# Altium PCB UHVValveCtrlv1.PcbDoc (part 1 of 2)
Units mm, origin at the board's own origin, x right, y up, seen from the top; angles counter-clockwise.
Board outline 139.7 x 45.72 mm, 2 copper layers (Top Layer, Bottom Layer); 66 components, 39 nets, 217 pads, 30 vias.
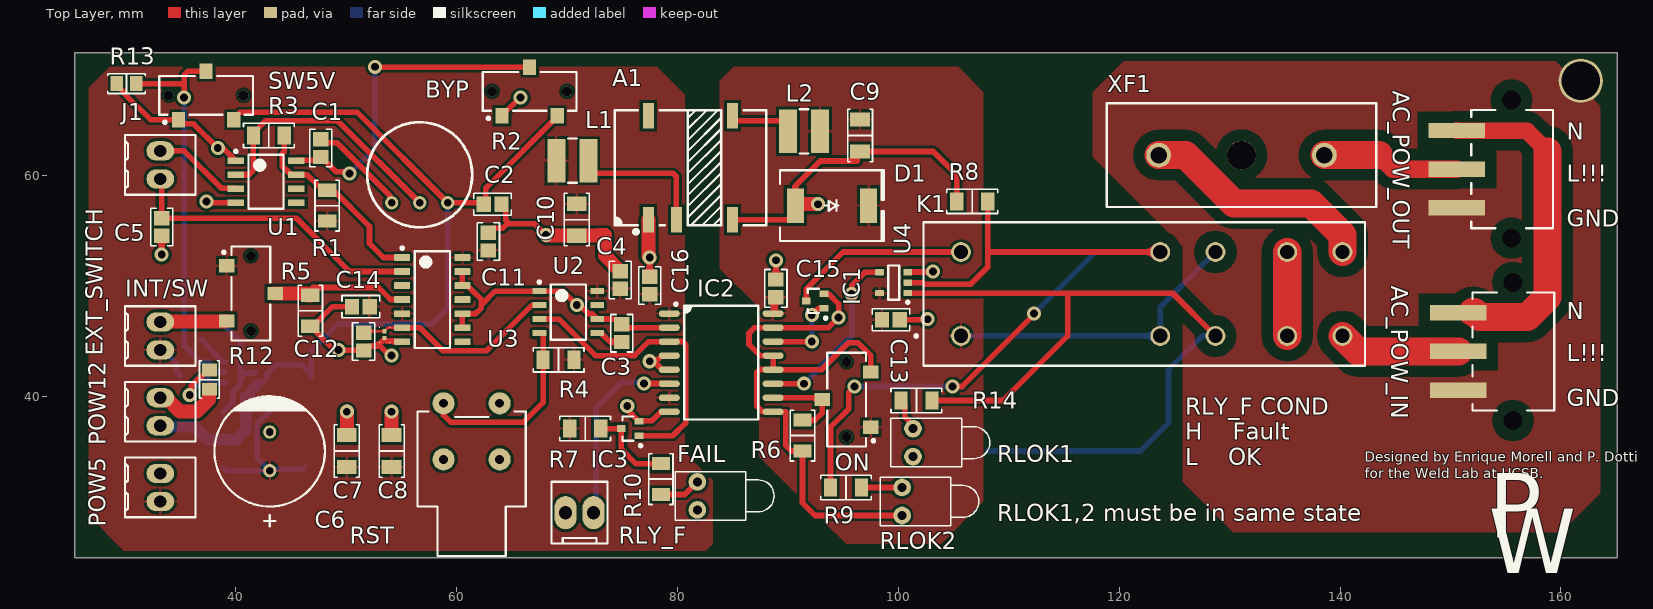
[diagram p0: Top Layer view]
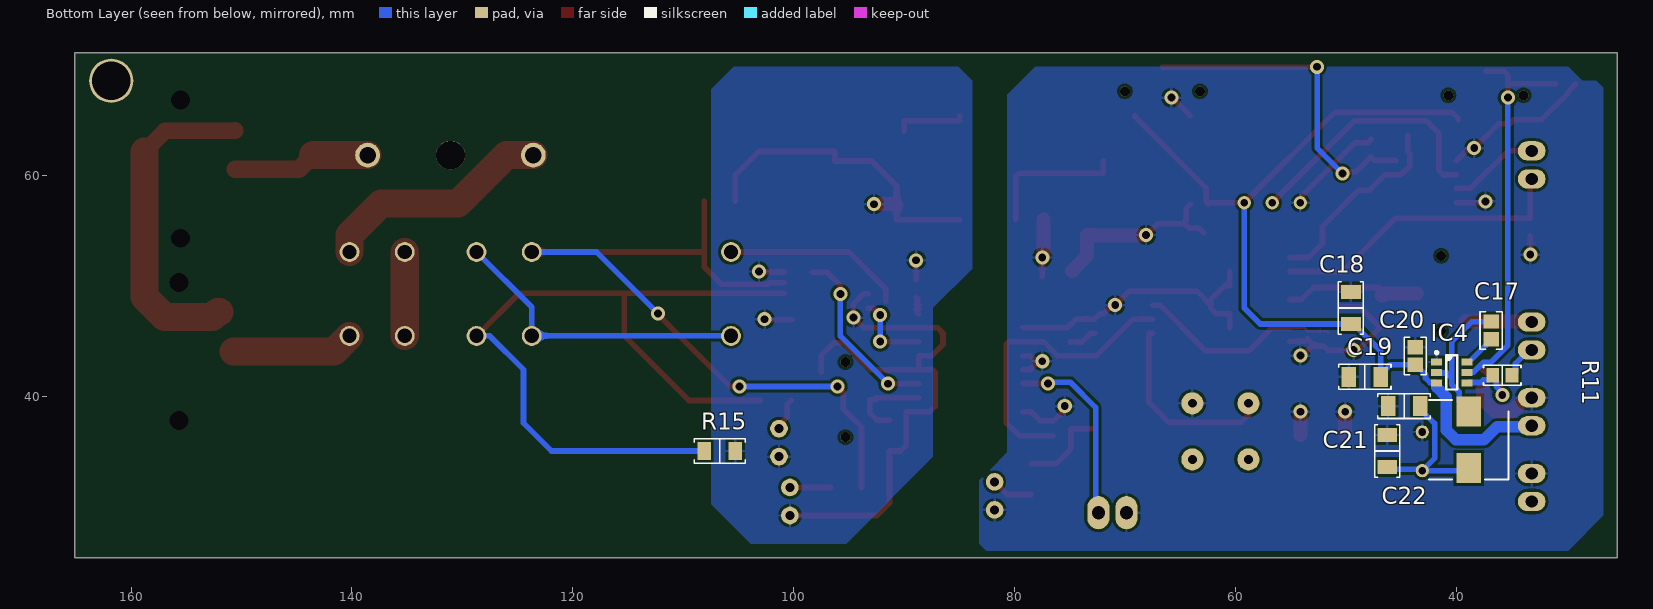
[diagram p1: Bottom Layer view, seen from below]
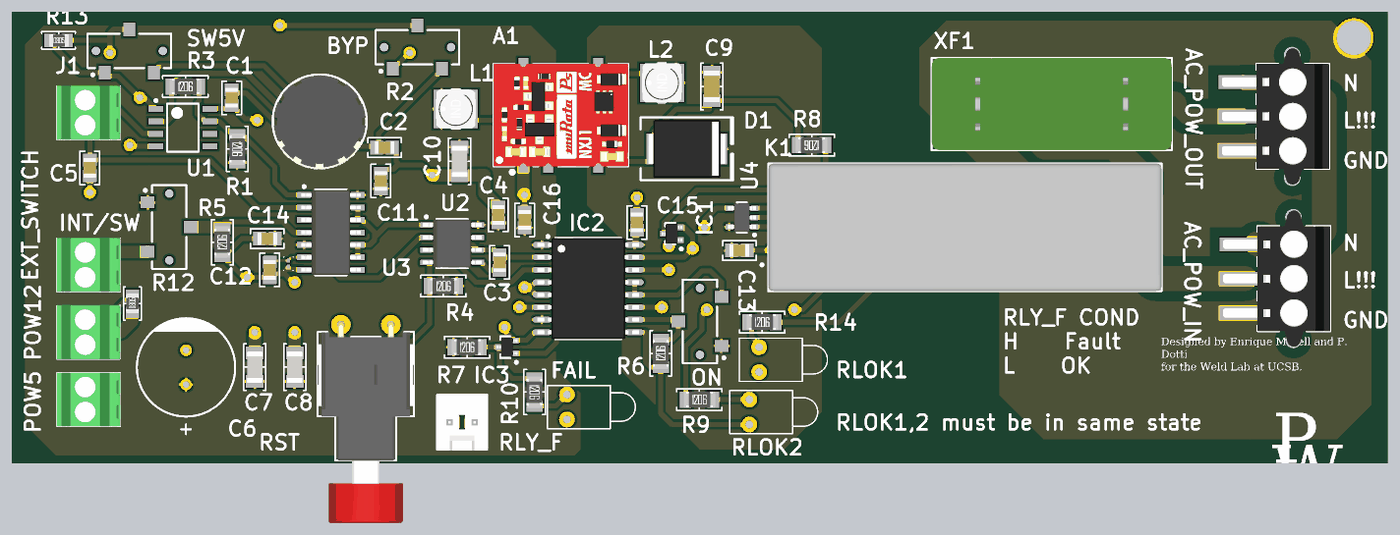
[diagram p2: 3D render of the assembled board from above, using the file's embedded part models]
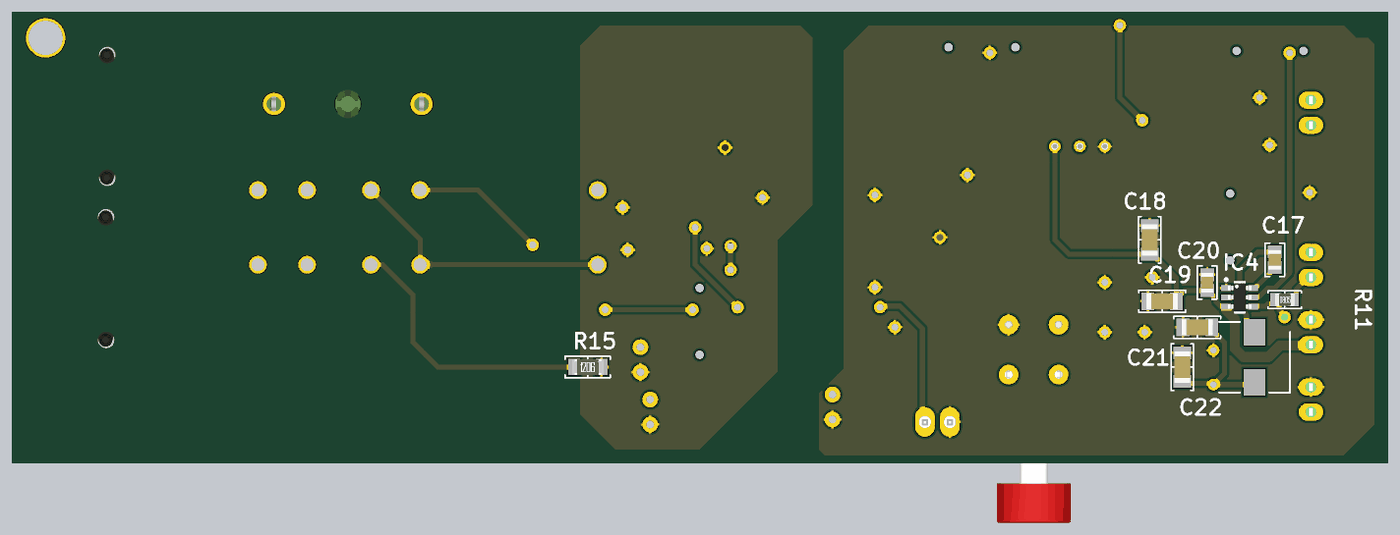
[diagram p3: 3D render of the assembled board from below, using the file's embedded part models]

## Layer stack, top to bottom
Top Solder: solder mask 0.0102, Solder Resist, Dk 3.5
Top Layer: signal copper 0.0356
Dielectric 1: dielectric 0.32, FR-4, Dk 4.8
Bottom Layer: signal copper 0.0356
Bottom Solder: solder mask 0.0102, Solder Resist, Dk 3.5

## Board outline
25.4,25.4 25.4,71.12 165.1,71.12 165.1,25.4

## Design rules (kind name [scope] priority, off if disabled: settings)
Clearance Clearance_1 [All vs InNetClass('AC')] p1: gap=1.016 ignorepadtopadclearanceinfootprint=FALSE
Clearance [All] p2: gap=0.152 ignorepadtopadclearanceinfootprint=FALSE
HoleSize [All] p1: absolutevalues=TRUE maxlimit=4 minlimit=0.254 maxpercent=80.000 minpercent=20.000
PlaneClearance PlaneClearance_1 [InNetClass('AC')] p1: clearance=1.27
PlaneClearance [All] p2: clearance=0.508
PolygonConnect PolygonConnect_1 [All vs InNetClass('AC')] p1: thpad.connectstyle=Direct thpad.reliefconductorwidth=0.254 thpad.reliefentries=4 thpad.polygonreliefangle="90 Angle" thpad.airgapwidth=0.254 smdpad.connectstyle=Direct smdpad.reliefconductorwidth=0.254 smdpad.reliefentries=4 smdpad.polygonreliefangle="90 Angle" smdpad.airgapwidth=0.254 via.connectstyle=Relief via.reliefconductorwidth=0.254 via.reliefentries=4 via.polygonreliefangle="90 Angle" via.airgapwidth=0.254
PolygonConnect [All] p2: connectstyle=Relief reliefconductorwidth=0.254 reliefentries=4 polygonreliefangle="90 Angle" airgapwidth=0.254
RoomDefinition U_Logic [InComponentClass('U_Logic')] p1: confinementstyle=ConfineIn formatcopy=TRUE lockcomponents=FALSE outline 49.276,42.926 64.262,42.926 64.262,56.134 49.276,56.134
RoomDefinition U_IonValveCtrl [InComponentClass('U_IonValveCtrl')] p2: confinementstyle=ConfineIn formatcopy=TRUE lockcomponents=FALSE outline 67.31,25.146 160.274,25.146 160.274,68.58 67.31,68.58
RoomDefinition U_InputConnectors [InComponentClass('U_InputConnectors')] p3: confinementstyle=ConfineIn formatcopy=TRUE lockcomponents=FALSE outline 28.056,67.097 28.056,69.555 32.69,69.555 32.69,70.515 41.898,70.515 41.898,53.924 44.607,53.924 44.607,50.71 50.984,50.71 50.984,37.756 55.556,37.756 55.556,32.348 48.407,32.348 48.407,27.862 37.699,27.862 37.699,28.096 29.093,28.096 29.093,67.097
RoomDefinition U_FlipFlop [InComponentClass('U_FlipFlop')] p4: confinementstyle=ConfineIn formatcopy=TRUE lockcomponents=FALSE outline 54.987,17.936 54.987,41.644 66.475,41.644 66.475,50.859 73.474,50.859 73.474,52.575 76.132,52.575 76.132,46.479 76.259,46.479 76.259,42.421 71.844,42.421 71.844,41.878 67.695,41.878 67.695,17.936
RoomDefinition U_AnalogPressure [InComponentClass('U_AnalogPressure')] p5: confinementstyle=ConfineIn formatcopy=TRUE lockcomponents=FALSE outline 38.847,56.607 38.847,62.695 40.351,62.695 40.351,65.056 51.041,65.056 51.041,65.672 61.989,65.672 61.989,70.876 71.197,70.876 71.197,63.666 65.275,63.666 65.275,56.075 62.243,56.075 62.243,54.47 51.041,54.47 51.041,54.648 46.831,54.648 46.831,56.607
RoutingVias [All] p1: holewidth=0.711 width=1.27 viastyle="Through Hole" minholewidth=0.711 minwidth=1.27 maxholewidth=0.711 maxwidth=1.27
SilkToSolderMaskClearance [IsPad] p1: minsilkscreentomaskgap=0.15 clearancetoexposedcopper=TRUE
SolderMaskExpansion [All] p1: expansion=0.102
Width Width_1 [InNetClass('AC')] p1: maxlimit=5.08 minlimit=1.02 preferedwidth=2.54
Width [All] p2: maxlimit=1.27 minlimit=0.254 preferedwidth=0.508
27 further rules are at their usual default settings.

## Classes and differential pairs
net class AC: AC_GND AC_LIVE AC_LIVE_Fuse AC_LIVE_IN AC_LIVE_OUT AC_NEUTRAL
component class U_Logic: C11 C12 C14 U3
component class U_IonValveCtrl: A1 AC_POW_IN AC_POW_OUT C9 C10 C13 C15 C16 D1 FAIL IC1 IC2 IC3 K1 L1 L2 ON R6 R7 R8 R9 R10 R14 R15 RLOK1 RLOK2 RLY_F U4 XF1
component class U_InputConnectors: C5 C6 C7 C8 C17 C18 C19 C20 C21 C22 EXT_SWITCH IC4 INT/SW J1 POW5 POW12 R5 R11 R12 R13 SW5V
component class U_FlipFlop: C3 C4 R4 RST U2
component class U_AnalogPressure: BYP C1 C2 R1 R2 R3 U1

## Components (designator, comment, footprint, x,y, rotation, side; value= is the part's Value field where it differs from the comment)
A1 "NXJ1S0505MC-R7" "MURATA NXJ1" 82.423,60.706 r0 top
AC_POW_IN "691508110303" "WURTH 691508110303" 155.702,44.069 r270 top
AC_POW_OUT "691508110303" "WURTH 691508110303" 155.575,60.579 r270 top
BYP "CL-SB-12B-01T" SW_CL-SB-12B-01 66.637,67.163 r0 top
C1 "0.1uF" "CAP 0805/2012" 47.679,62.484 r90 top
C2 "0.1uF" "CAP 0805/2012" 63.246,57.404 r0 top
C3 "10000pF" "CAP 0805/2012" 74.93,45.72 r270 top
C4 "0.1uF" "CAP 0805/2012" 74.803,50.546 r270 top
C5 "10000pF" "CAP 0805/2012" 33.274,55.334 r270 top
C6 "22uF" "CAP AL TH D8 L3.5 H11.5" 43.053,33.274 r90 top
C7 "4.7uF" "CAP 1206/3216 - 1.0MM" 50.038,35.052 r90 top
C8 "4.7uF" "CAP 1206/3216 - 1.0MM" 54.102,35.052 r90 top
C9 "2.2uF" "CAP 1206/3216" 96.52,63.627 r270 top
C10 "4.7uF" "CAP 1206/3216 - 1.8MM" 70.866,56.007 r90 top
C11 "0.1uF" "CAP 0805/2012" 62.865,54.013 r90 top
C12 "0.1uF" "CAP 0805/2012" 51.562,44.958 r270 top
C13 "0.1uF" "CAP 0805/2012" 99.314,46.938 r0 top
C14 "0.1uF" "CAP 0805/2012" 51.308,48.133 r180 top
C15 "0.1uF" "CAP 0805/2012" 88.9,49.784 r90 top
C16 "0.1uF" "CAP 0805/2012" 77.47,50.038 r90 top
C17 "0.1uF" "CAP 0805/2012" 36.83,45.974 r90 bottom
C18 "10uF" "CAP 1206/3216" 49.53,48.006 r270 bottom
C19 "10uF" "CAP 1206/3216" 48.26,41.77 r180 bottom
C20 "0.1uF" "CAP 0805/2012" 43.688,43.65 r270 bottom
C21 "22uF" "CAP 1206/3216" 44.704,39.116 r180 bottom
C22 "22uF" "CAP 1206/3216" 46.228,35.052 r270 bottom
D1 "SM15T15CA" "ST DO214AB SMC" 93.98,57.277 r0 top
EXT_SWITCH "282834-2" "TE 282834-2" 33.147,45.466 r90 top
FAIL "LED2" LED-1 81.788,30.988 r0 top
IC1 "BSS138WH6327XTSA1" "INFINEON SOT-323-3" 92.456,48.641 r180 top
IC2 "SI8641BB-B-IS" "SI LABS SOIC-16 WIDE" 83.947,43.053 r0 top
IC3 "BSS138WH6327XTSA1" "INFINEON SOT-323-3" 75.692,37.084 r180 top
IC4 "TPS563201DDCT" "TI SOT-23-6 DDC" 40.386,42.164 r180 bottom
INT/SW "CL-SB-12B-01T" SW_CL-SB-12B-01 40.894,49.276 r270 top (schematic designator INT_SWITCH)
J1 "282834-2" "TE 282834-2" 33.147,60.96 r90 top
K1 "7-1415054-1" TECO-3-1415055-1-10_V 122.936,49.276 r0 top
L1 "VLCF4024T-4R7N1R4-2" "TDK VLCF4024-2" 70.485,61.341 r0 top value=4.7uH
L2 "VLCF4024T-100MR90-2" "TDK VLCF4024-2" 91.44,64.008 r0 top value=10uH
ON "CL-SB-12B-01T" SW_CL-SB-12B-01 95.758,39.751 r90 top
POW5 "282834-2" "TE 282834-2" 33.147,31.75 r90 top
POW12 "282834-2" "TE 282834-2" 33.147,38.608 r90 top
R1 "1k" "RES 1206/3216" 48.26,57.277 r270 top
R2 "20k" "POT MODEL91A" 56.642,60.071 r0 top
R3 "510k" "RES 1206/3216" 42.98,63.627 r0 top
R4 "10k" "RES 1206/3216" 69.215,43.307 r0 top
R5 "10k" "RES 1206/3216" 46.736,47.752 r90 top
R6 "10k" "RES 1206/3216" 91.313,36.449 r90 top
R7 "620" "RES 1206/3216" 71.628,37.084 r0 top
R8 "10k" "RES 1206/3216" 106.68,57.658 r180 top
R9 "620" "RES 1206/3216" 95.25,31.75 r0 top
R10 "620" "RES 1206/3216" 78.486,32.512 r270 top
R11 "54.9k" "RES 0805/2012" 35.814,41.91 r180 bottom
R12 "10k" "RES 0805/2012" 37.592,41.515 r90 top
R13 "10k" "RES 0805/2012" 30.085,68.326 r0 top
R14 "620" "RES 1206/3216" 101.63,39.624 r0 top
R15 "10k" "RES 1206/3216" 106.68,35.052 r180 bottom
RLOK1 "LED1" LED-1 101.319,35.81 r0 top
RLOK2 "LED1" LED-1 100.33,30.48 r0 top
RLY_F "0022272021" "MOLEX KK 0022272021" 71.12,29.464 r0 top
RST "AB11AH-HC" "NKK AB11AH-HC" 61.341,34.29 r180 top
SW5V "CL-SB-12B-01T" SW_CL-SB-12B-01 37.338,66.802 r0 top
U1 "LM311DR2G" ONSC-SOIC-8-751-07_V 42.726,59.436 r0 top
U2 "NE555D" D0008A_L 70.104,47.625 r0 top
U3 "CD74HC21M96" D0014A_N 57.785,48.768 r0 top
U4 "SN74LVC1G86DBVR" DBV0005A_L 99.568,50.292 r180 top
XF1 "696105003002" 696105003002 131.071,61.849 r0 top

## Footprints (in the part's own frame and the unit in brackets; to place one, negate y for a bottom-side part, rotate by r counter-clockwise, add the part's x,y. Pads: shape width x height; smd on the part's side, far side on the other; paste and mask are expansions set on the pad)
696105003002 [mm] "FUSEHOLDER BLOCKS - PCB - CLIP COVER - THT"
  round 2.25 hole 1.5: 1(-7.5,0) 2(7.5,0)
  round 2.6 hole 2.6 unplated: MH1(0,0)
  silkscreen extent -12.2,-4.7 12.2,4.7, body extent -12.2,-4.7 12.2,4.7, height 11.55
"CAP 0805/2012" [mm] "Chip Capacitor, 2-Leads, Body 2.00x1.20mm, IPC Medium Density"
  rect 1.3x1.4 smd: 1(-0.8,0) 2(0.8,0)
  silkscreen extent -1.7,-1 1.7,1, body extent -1,-0.64 1,0.64, height 1.26
"CAP 1206/3216" [mm] "Chip Capacitor, 2-Leads, Body 3.25x1.60mm, IPC Medium Density"
  rect 1.3x1.8 smd: 1(-1.45,0) 2(1.45,0)
  silkscreen extent -2.38,-1.13 2.38,1.13, body extent -1.6,-0.81 1.6,0.81, height 1.62
"CAP 1206/3216 - 1.0MM" [mm] "Chip Capacitor, 2-Leads, Body 3.25x1.60mm, IPC Medium Density"
  rect 1.3x1.8 smd: 1(-1.45,0) 2(1.45,0)
  silkscreen extent -2.38,-1.13 2.38,1.13, body extent -1.6,-0.8 1.6,0.8, height 1
"CAP 1206/3216 - 1.8MM" [mm] "Chip Capacitor, 2-Leads, Body 3.25x1.60mm, IPC Medium Density"
  rect 1.3x1.8 smd: 1(-1.45,0) 2(1.45,0)
  silkscreen extent -2.38,-1.13 2.38,1.13, body extent -1.6,-0.8 1.6,0.8, height 1.8
"CAP AL TH D8 L3.5 H11.5" [mm]
  round 1.2 hole 0.7: 1(0,0) 2(3.5,0)
  silkscreen extent -5.06,-5 6.75,5
D0008A_L [mm] "SOIC, 8-Leads, Body 5x4mm, Pitch 1.27mm, IPC High Density"
  rrect18% 1.25x0.55 smd: 1(-2.625,1.905) 2(-2.625,0.635) 3(-2.625,-0.635) 4(-2.625,-1.905) 5(2.625,-1.905) 6(2.625,-0.635) 7(2.625,0.635) 8(2.625,1.905)
  silkscreen extent -2.75,-2.5 1.6,2.85, body extent -3,-2.45 3,2.45, height 1.63
D0014A_N [mm] "SOIC, 14-Leads, Body 8.75x4mm, Pitch 1.27mm, IPC Medium Density"
  rrect17% 1.45x0.6 smd: 1(-2.725,3.81) 2(-2.725,2.54) 3(-2.725,1.27) 4(-2.725,0) 5(-2.725,-1.27) 6(-2.725,-2.54) 7(-2.725,-3.81) 8(2.725,-3.81) 9(2.725,-2.54) 10(2.725,-1.27) 11(2.725,0) 12(2.725,1.27) 13(2.725,2.54) 14(2.725,3.81)
  silkscreen extent -2.85,-4.37 1.6,4.78, body extent -3.02,-4.32 3.02,4.32, height 1.59
DBV0005A_L [mm] "SOT23, 5-Leads, Body 3.05x1.75mm, Pitch 0.95mm, IPC High Density"
  rrect18% 0.8x0.55 smd: 1(-1.275,0.95) 2(-1.275,0) 3(-1.275,-0.95) 4(1.275,-0.95) 5(1.275,0.95)
  silkscreen extent -1.4,-1.55 0.5,1.9, body extent -1.42,-1.46 1.42,1.46, height 1.08
"INFINEON SOT-323-3" [mm] "SOT323, 3-Leads, Body 2.00x2.10mm, Pitch 0.65mm, IPC Medium Density"
  rect 0.8x0.6 smd: 1(-0.8,0.65) 2(0.8,0) 3(-0.8,-0.65)
  silkscreen extent -1.08,-1.1 0.67,1.67, body extent -1.06,-1 1.06,1, height 1
LED-1 [mm] "LED; 2 Leads"
  round 1.6 hole 0.8: 1(0,1.27) 2(0,-1.27)
  silkscreen extent -2,-2.2 6.95,2.2
"MOLEX KK 0022272021" [mm]
  oval 2x3 hole 1.2: 1(-1.27,0) 2(1.27,0)
  silkscreen extent -2.54,-2.79 2.54,2.79, body extent -2.54,-2.9 2.54,2.9, height 11.7
"MURATA NXJ1" [mm]
  rect 1x2.3 smd: 1(-5.08,-4.7) 3(-2.54,-4.7) 7(2.54,-4.7) 8(2.54,4.7) 14(-5.08,4.7)
  silkscreen extent -8.12,-5.9 5.6,5.21, body extent -8.13,-5.23 5.59,5.23, height 4.22
"NKK AB11AH-HC" [mm]
  round 2 hole 0.8: 1(2.54,-5.08) 2(2.54,0) 3(-2.54,-5.08) 4(-2.54,0)
  silkscreen extent -4.9,-4.34 4.9,8.76, body extent -4.9,-5.39 4.9,15.08, height 7.06
ONSC-SOIC-8-751-07_V [mm] "SOIC, 8-Leads, Body 4.9x3.9mm, Pitch 1.27mm"
  rect 1.52x0.6 smd: 1(-2.74,1.905) 2(-2.74,0.635) 3(-2.74,-0.635) 4(-2.74,-1.905) 5(2.74,-1.905) 6(2.74,-0.635) 7(2.74,0.635) 8(2.74,1.905)
  silkscreen extent -2.86,-2.45 1.58,2.88, body extent -1.95,-2.45 1.95,2.45, height 1.75
"POT MODEL91A" [mm]
  round 1.2 hole 0.7: 1(-2.54,-2.54) 2(0,-2.54) 3(2.54,-2.54)
  silkscreen extent -4.76,-4.76 4.76,4.76, body extent -4.68,-4.88 4.68,4.7, height 4.89
"RES 0805/2012" [mm] "Chip Resistor, 2-Leads, Body 2.00x1.25mm, IPC Medium Density"
  rect 1.15x1.35 smd: 1(-0.875,0) 2(0.875,0)
  silkscreen extent -1.7,-0.9 1.7,0.9, body extent -0.95,-0.62 1.05,0.63, height 0.6
"RES 1206/3216" [mm] "Chip Resistor, 2-Leads, Body 3.13x1.55mm, IPC Medium Density"
  rect 1.2x1.65 smd: 1(-1.4,0) 2(1.4,0)
  silkscreen extent -2.3,-1.1 2.3,1.1, body extent -1.57,-0.8 1.62,0.8, height 0.6
"SI LABS SOIC-16 WIDE" [mm] "SOIC, 16-Leads, Body 10.30x7.50mm, Pitch 1.27mm, IPC Medium Density"
  oval 1.9x0.6 smd: 1(-4.7,4.445) 2(-4.7,3.175) 3(-4.7,1.905) 4(-4.7,0.635) 5(-4.7,-0.635) 6(-4.7,-1.905) 7(-4.7,-3.175) 8(-4.7,-4.445) 9(4.7,-4.445) 10(4.7,-3.175) 11(4.7,-1.905) 12(4.7,-0.635) 13(4.7,0.635) 14(4.7,1.905) 15(4.7,3.175) 16(4.7,4.445)
  silkscreen extent -4.22,-5.15 3.35,5.42, body extent -5.16,-5.15 5.16,5.15, height 2.65
"ST DO214AB SMC" [mm] "Molded Diode, 2-Leads, Body 6.85x5.90mm, IPC Medium Density"
  rect 1.54x3.14 smd: 1(-3.325,0) 2(3.325,0)
  silkscreen extent -4.7,-3.2 4.7,3.2, body extent -3.97,-2.95 3.97,2.95, height 2.6
SW_CL-SB-12B-01 [mm]
  rect 1.2x1.4 smd: 1(-2.544,-1.743) 2(-0.044,2.657) 3(2.456,-1.743)
  round 0.9 hole 0.9 unplated: MH1(-3.444,0.457) MH2(3.356,0.457)
  silkscreen extent -4.29,-2.11 4.21,2.21, body extent -4.29,-1.29 4.21,2.21, height 5.5
"TDK VLCF4024-2" [mm] "Precision Wire Wound Inductor, 2-Leads, Body 4.00x4.00mm, IPC Medium Density"
  rect 1.6x3.9 smd: 1(-1.45,0) 2(1.45,0)
  silkscreen extent -0.4,-2 0.4,2, body extent -2.05,-2 2.05,2, height 2.4
"TE 282834-2" [mm]
  oval 1.75x2.5 hole 1.1: 1(-1.27,0) 2(1.27,0)
  silkscreen extent -2.7,-3.2 2.7,3.2, body extent -2.77,-3.25 2.77,3.25, height 10
TECO-3-1415055-1-10_V [mm] "THD, 10-Leads, Body 40x13mm"
  round 1.8 hole 1.3: 11(0.775,3.8) 12(5.775,3.8) 21(0.775,-3.8) 22(5.775,-3.8) 33(17.275,3.8) 34(12.275,3.8) 43(17.275,-3.8) 44(12.275,-3.8) A1(-17.275,-3.8) A2(-17.275,3.8)
  silkscreen extent -21.45,-6.5 19.32,6.5, body extent -20.68,-6.5 19.32,6.5, height 16.5
"TI SOT-23-6 DDC" [mm] "SOT23, 6-Leads, Body 2.90x2.80mm, Pitch 0.95mm, IPC Medium Density"
  rect 1x0.6 smd: 1(-1.375,0.95) 2(-1.375,0) 3(-1.375,-0.95) 4(1.375,-0.95) 5(1.375,0) 6(1.375,0.95)
  silkscreen extent -1.5,-1.55 0.5,1.92, body extent -1.19,-1.45 1.19,1.45, height 1
"WURTH 691508110303" [mm]
  rect 1.4x5.1 smd: 1(-3.5,-5) 2(0,-5) 3(3.5,-5)
  round 1 hole 1.7 unplated: M(-6.25,-0.05) M(6.25,-0.05)
  silkscreen extent -5.35,-3.7 5.35,3.7, body extent -6.92,-7.2 6.92,3.7, height 11.2

## Part data
A1: "DC/DC SM 1W 5V-5V SINGLE 4.2KV", Current - Output (Max)=200mA, Device Package="14-SMD Module (5 Leads)", Manufacturer="Murata Power Solutions Inc.", Operating Temperature="-40C ~ 85C", Power (Watts)=1W, Supplier Part Number 1=811-3094-1-ND, Voltage - Input (Max)=5.5V, Voltage - Input (Min)=4.5V, Voltage - Isolation="4.2kV (4200V)", Voltage - Output 1=5V, ComponentLink1Description=Datasheet, ComponentLink1URL=http://power.murata.com/data/power/ncl/kdc_nxj1.pdf, ComponentLink2Description="Digi-Key Listing", ComponentLink2URL=https://www.digikey.com/product-detail/en/murata-power-solutions-inc/NXJ1S0505MC-R7/811-3094-1-ND/5697921, Number Of Outputs=1, PartId=14964, Part Number=NXJ1S0505MC-R7, Price=3.55, Supplier 1=Digi-Key, Type="Isolated Module"
AC_POW_IN AC_POW_OUT: "CONN TERM BLK 3POS 3.5MM BLACK", Colour=Black, Manufacturer="Wurth Electronics Inc", Supplier Part Number 1=732-5964-2-ND, TemperatureRange="-40C ~ 130C", Voltage=300V, ComponentLink1Description=Datasheet, ComponentLink1URL=http://katalog.we-online.de/em/datasheet/6915081103xx.pdf, ComponentLink2Description="Digi-Key Listing", ComponentLink2URL=http://www.digikey.com/product-detail/en/wurth-electronics-inc/691508110303/732-5964-2-ND/5047809, Number Of Levels=1, Orientation="Horizontal and Vertical with Board", PartId=16443, Part Number=691508110303, Pitch="0.138\" (3.50mm)", Positions Per Level=3, Price=2.334, Supplier 1=Digi-Key, Type="Terminal Blocks - Wire to Board"
BYP INT/SW ON SW5V: "SWITCH SLIDE SPDT 200MA 12V", Manufacturer="Nidec Copal Electronics", Operating Temperature="-40°C ~ 85°C", Supplier Part Number 1=563-1318-1-ND, Actuator Type=Standard, Circuit=SPDT, ComponentLink1Description=Datasheet, ComponentLink1URL=https://www.nidec-copal-electronics.com/e/catalog/switch/cl-sb.pdf, ComponentLink2Description="Digi-Key Listing", ComponentLink2URL=https://www.digikey.com/product-detail/en/nidec-copal-electronics/CL-SB-12B-01T/563-1318-1-ND/3507878, Mechanical Life="10,000 Cycles", PartId=16472, Part Number=CL-SB-12B-01T, Price=0.9, Series=CL-SB, Supplier 1=Digi-Key, Switch Function=On-On, Switch Travel=2.00mm, Type="Slide Switches"
C1 C2 C4 C11 C12 C13 C14 C15 C16 C17 C20: library part CL21B104KACNNNC, "CAP CER 0.1UF 25V X7R 0805", Device Package="0805 (2012 Metric)", Manufacturer="Samsung Electro-Mechanics America, Inc.", Supplier Part Number 1=1276-1099-2-ND, TemperatureCoefficient=X7R, TemperatureRange="-55C ~ 125C", Tolerance=10%, Voltage=25V, ComponentLink1Description=Datasheet, ComponentLink1URL=http://www.samsungsem.com/kr/support/product-search/mlcc/CL21B104KACNNNC.jsp, ComponentLink2Description="Digi-Key listing", ComponentLink2URL=http://digikey.com/product-detail/en/CL21B104KACNNNC/1276-1099-2-ND/3886757, PartId=5699, Part Number=CL21B104KACNNNC, Price=0.0099, Supplier 1=Digi-Key, Type=-
C3 C5: library part CL21B103KAANNNC, "CAP CER 10000PF 25V X7R 0805", Device Package="0805 (2012 Metric)", Manufacturer="Samsung Electro-Mechanics America, Inc.", Supplier Part Number 1=1276-2434-2-ND, TemperatureCoefficient=X7R, TemperatureRange="-55C ~ 125C", Tolerance=10%, Voltage=25V, ComponentLink1Description=Datasheet, ComponentLink1URL=http://www.samsungsem.com/kr/support/product-search/mlcc/CL21B103KAANNNC.jsp, ComponentLink2Description="Digi-Key listing", ComponentLink2URL=http://digikey.com/product-detail/en/CL21B103KAANNNC/1276-2434-2-ND/3888092, PartId=5695, Part Number=CL21B103KAANNNC, Price=0.0081, Supplier 1=Digi-Key, Type=-
C6: library part EEU-FC2A220, "CAP ALUM 22UF 20% 100V RADIAL", Device Package="Radial, Can - TH", Lifetime @ Temp="2000 Hrs @ 105°C", Manufacturer="Panasonic Electronic Components", Ripple Current=169mA, Supplier Part Number 1=P10770-ND, TemperatureRange="-55°C ~ 105°C", Tolerance=20%, Voltage=100V, ComponentLink1Description=Datasheet, ComponentLink1URL=https://industrial.panasonic.com/ww/products/capacitors/aluminum-capacitors/aluminum-cap-lead/fc/EEUFC2A220, ComponentLink2Description="Digi-Key listing", ComponentLink2URL=https://www.digikey.com/product-detail/en/panasonic-electronic-components/EEU-FC2A220/P10770-ND/285722, PartId=7484, Part Number=EEU-FC2A220, Price=0.46, Supplier 1=Digi-Key, Type=Automotive
C7 C8: library part C3216X5R1H475K085AB, "CAP CER 4.7UF 50V X5R 1206", Device Package="1206 (3216 Metric)", Manufacturer="TDK Corporation", Supplier Part Number 1=445-14692-2-ND, TemperatureCoefficient=X5R, TemperatureRange="-55C ~ 85C", Tolerance=10%, Voltage=50V, ComponentLink1Description=Datasheet, ComponentLink1URL=https://product.tdk.com/info/en/catalog/datasheets/mlcc_commercial_general_en.pdf, ComponentLink2Description="Digi-Key Listing", ComponentLink2URL=https://www.digikey.com/product-detail/en/tdk-corporation/C3216X5R1H475K085AB/445-14692-2-ND/3951928, PartId=17022, Part Number=C3216X5R1H475K085AB, Price=0.3159, Supplier 1=Digi-Key
C9: library part CL31B225KCHSNNE, "CAP CER 2.2UF 100V X7R 1206", Device Package="1206 (3216 Metric)", Manufacturer="Samsung Electro-Mechanics America, Inc.", Supplier Part Number 1=1276-3138-2-ND, TemperatureCoefficient=X7R, TemperatureRange="-55C ~ 125C", Tolerance=10%, Voltage=100V, ComponentLink1Description=Datasheet, ComponentLink1URL=http://media.digikey.com/pdf/Data%20Sheets/Samsung%20PDFs/CL31B225KCHSNNE_Spec.pdf, ComponentLink2Description="Digi-Key listing", ComponentLink2URL=http://digikey.com/product-detail/en/CL31B225KCHSNNE/1276-3138-2-ND/3888796, PartId=6260, Part Number=CL31B225KCHSNNE, Price=0.3227, Supplier 1=Digi-Key, Type=-
C10: library part CL31B475KPHNNNE, "CAP CER 4.7UF 10V X7R 1206", Device Package="1206 (3216 Metric)", Manufacturer="Samsung Electro-Mechanics America, Inc.", Supplier Part Number 1=1276-1133-2-ND, TemperatureCoefficient=X7R, TemperatureRange="-55C ~ 125C", Tolerance=10%, Voltage=10V, ComponentLink1Description=Datasheet, ComponentLink1URL=http://www.samsungsem.com/kr/front/downloadcms.do?path=/kr/support/product-search/mlcc/__icsFiles/afieldfile/2014/11/05&fileName=C_CL31B475KPHNNNE.pdf, ComponentLink2Description="Digi-Key Listing", ComponentLink2URL=https://www.digikey.com/product-detail/en/samsung-electro-mechanics-america-inc/CL31B475KPHNNNE/1276-1133-2-ND/3886791, PartId=17410, Part Number=CL31B475KPHNNNE, Price=0.0761, Supplier 1=Digi-Key
C18 C19: library part C1206C106M3RACTU, "CAP CER 10UF 25V X7R 1206", Device Package="1206 (3216 Metric)", Manufacturer=Kemet, Supplier Part Number 1=399-7443-2-ND, TemperatureCoefficient=X7R, TemperatureRange="-55C ~ 125C", Tolerance=20%, Voltage=25V, ComponentLink1Description=Datasheet, ComponentLink1URL=http://www.kemet.com/docfinder?Partnumber=C1206C106M3RACTU, ComponentLink2Description="Digi-Key listing", ComponentLink2URL=http://digikey.com/product-detail/en/C1206C106M3RACTU/399-7443-2-ND/3317649, PartId=6235, Part Number=C1206C106M3RACTU, Price=0.2272, Supplier 1=Digi-Key, Type=-
C21 C22: library part CL31A226KAHNNNE, "CAP CER 22UF 25V X5R 1206", Device Package="1206 (3216 Metric)", Manufacturer="Samsung Electro-Mechanics America, Inc.", Supplier Part Number 1=1276-3047-2-ND, TemperatureCoefficient=X5R, TemperatureRange="-55C ~ 85C", Tolerance=10%, Voltage=25V, ComponentLink1Description=Datasheet, ComponentLink1URL=//media.digikey.com/pdf/Data%20Sheets/Samsung%20PDFs/CL31A226KAHNNNE_Spec.pdf, ComponentLink2Description="Digi-Key Listing", ComponentLink2URL=https://www.digikey.com/product-detail/en/samsung-electro-mechanics-america-inc/CL31A226KAHNNNE/1276-3047-2-ND/3888705, PartId=15794, Part Number=CL31A226KAHNNNE, Price=0.1785, Supplier 1=Digi-Key
D1: "TVS DIODE 12.8VWM 27.2VC SMC", Current - Peak Pulse="368A (8/20us)", Device Package="DO-214AB, SMC", Manufacturer=STMicroelectronics, Operating Temperature="-55C ~ 150C (TJ)", Power - Peak Pulse="1500W (1.5kW)", Supplier Part Number 1=497-7863-2-ND, Voltage (Breakdown)=14.3V, Voltage (Clamping)=27.2V, Voltage (Reverse Standoff)=12.8V, Bidirectional Channels=1, ComponentLink1Description=Datasheet, ComponentLink1URL=http://www.st.com/web/en/resource/technical/document/datasheet/CD00000724.pdf, ComponentLink2Description="Digi-Key Listing", ComponentLink2URL=https://www.digikey.com/product-detail/en/stmicroelectronics/SM15T15CA/497-7863-2-ND/1039033, PartId=14821, Part Number=SM15T15CA, Price=0.2798, Supplier 1=Digi-Key, Type=Zener
EXT_SWITCH J1 POW5 POW12: "TERM BLOCK 2POS SIDE ENT 2.54MM", Colour=Green, Manufacturer="TE Connectivity AMP Connectors", Supplier Part Number 1=A98333-ND, TemperatureRange="-40C ~ 105C", Voltage=150V, ComponentLink1Description=Datasheet, ComponentLink1URL=http://www.te.com/commerce/DocumentDelivery/DDEController?Action=srchrtrv&DocNm=282834&DocType=Customer+Drawing&DocLang=English, ComponentLink2Description="Digi-Key Listing", ComponentLink2URL=http://www.digikey.ca/product-detail/en/282834-2/A98333-ND/1150135, Number Of Levels=1, Orientation="Horizontal with Board", PartId=9289, Part Number=282834-2, Pitch="0.100\" (2.54mm)", Positions Per Level=2, Price=1.3, Supplier 1=Digi-Key
FAIL: library part LED1, "Typical RED GaAs LED", LatestRevisionDate=08-Jul-2005, LatestRevisionNote="Mech Layer 1 removed.", PackageDescription="LED; 2 Leads", PackageReference=LED-1, Published=8-Jun-2000, Publisher="Altium Limited"
IC1 IC3: "MOSFET N-CH 60V 280MA SOT-323", Current Continuous Drain="280mA (Ta)", Device Package="SC-70, SOT-323", Drain to Source Voltage (Vdss)=60V, Input Capacitance (Ciss) at Vds="43pF @ 25V", Manufacturer="Infineon Technologies", Power - Max=500mW, Supplier Part Number 1=BSS138WH6327XTSA1TR-ND, ComponentLink1Description=Datasheet, ComponentLink1URL=http://www.infineon.com/dgdl/Infineon-BSS138W-DS-v02_43-en.pdf?fileId=db3a304335113a6301351e62fcb4131f, ComponentLink2Description="Digi-Key Listing", ComponentLink2URL=http://www.digikey.com/product-detail/en/BSS138WH6327XTSA1/BSS138WH6327XTSA1TR-ND/5410120, Features="Logic Level Gate", Gate Charge (Qg)="1.5nC @ 10V", PartId=8084, Part Number=BSS138WH6327XTSA1, Price=0.0483, Rds On (Max) at Id, Vgs="3.5 Ohm @ 200mA, 10V", Supplier 1=Digi-Key, Type="MOSFET N-Channel, Metal Oxide", Vgs(th) (Max) at Id="1.4V @ 26uA"
IC2: library part Si8641BB-B-IS, "DGTL ISO 2.5KV GEN PURP 16SOIC", Device Package="16-SOIC (0.295\", 7.50mm Width)", Isolated Power=No, Manufacturer="Silicon Labs", Operating Temperature="-40C ~ 125C", Supplier Part Number 1=SI8641BB-B-IS-ND, Voltage - Isolation=2500Vrms, Voltage - Supply="2.5 V ~ 5.5 V", Channel Type=Unidirectional, Common Mode Transient Immunity (Min)=35kV/us, ComponentLink1Description=Datasheet, ComponentLink1URL=http://www.silabs.com/Support%20Documents/TechnicalDocs/Si864x.pdf, ComponentLink2Description="Digi-Key Listing", ComponentLink2URL=https://www.digikey.com/product-detail/en/silicon-labs/SI8641BB-B-IS/SI8641BB-B-IS-ND/4576743, Data Rate=150Mbps, Inputs - Side 1/Side2=3/1, Number of Channels=4, PartId=14408, Part Number=SI8641BB-B-IS, Price=3.81, Propagation Delay tpLH/tpHL (Max)="13ns, 13ns", Pulse Width Distortion (Max)=4.5ns, Rise / Fall Time (Typ)="2.5ns, 2.5ns", Supplier 1=Digi-Key, Technology="Capacitive Coupling", Type="General Purpose"
IC4: "IC REG BUCK ADJ 3A SYNC", Current Output=3A, Device Package="SOT-23-6 Thin, TSOT-23-6", Frequency - Switching=580kHz, Manufacturer="Texas Instruments", Operating Temperature="-45C ~ 125C (TJ)", Supplier Part Number 1=296-43393-2-ND, Voltage - Input (Max)=17V, Voltage - Input (Min)=4.5V, Voltage - Output (Max)=7V, Voltage - Output (Min/Fixed)=0.768V, ComponentLink1Description=Datasheet, ComponentLink1URL=http://www.ti.com/lit/ds/symlink/tps563201.pdf, ComponentLink2Description="Digi-Key Listing", ComponentLink2URL=http://www.digikey.com/product-detail/en/texas-instruments/TPS563201DDCT/296-43393-2-ND/5813458, Function=Step-Down, Number Of Outputs=1, Output Configuration=Positive, Output Type=Adjustable, PartId=16367, Part Number=TPS563201DDCT, Price=0.8901, Series="D-CAP2, Eco-Mode", Supplier 1=Digi-Key, Synchronous Rectifier=Yes, Topology=Buck, Type="DC DC Switching Regulators"
K1: library part CMP-1684-00019-1, "Force Guided Relay SR4 D/M, 5 V, 8 A, -25 to 70 degC, 10-Pin THD, RoHS, Box and Tube", Coil Current=33.33mA, Coil Resistance=720ohm, Coil Voltage DC=24V, Contact Current Rating=8A, Dropout Volt=2.4VDC, Manufacturer="TE Connectivity", Maximum Power Rating=2KVA, Operating Temp Range=-25Cto70C, Package / Case=DustCover, Package Description="10-Pin Through Hole device, Body 40 x 13 mm", Package Reference=THD, Pick-up Voltage (Max)=18VDC, Supplier Part Number 1=PB998-ND, Voltage Rating (VAC)=400V, Coil Suppression Diode=No, Contact Arrangement=DPST-NO/DPST-NC, Contact Form=2FormA/2FormB, Contact Material=AgSnO2, Datasheet URL=http://www.te.com/commerce/DocumentDelivery/DDEController?Action=showdoc&DocId=Data+Sheet%7FSR4_D%2FM%7F0415%7Fpdf%7FEnglish%7FENG_DS_SR4_DXM_0415.pdf%7F3-1415055-1, Datasheet Version="Rev. 0415", Dropout Volt (Min)=2.4VDC, LED Indicator=No, Manufacturer URL=http://www.te.com, Mounting Style=ThroughHole, Packaging=Tube, Pin Count=10, Product Depth (mm)=13mm, Product Height (mm)=16.5mm, Product Length (mm)=40mm, Push To Test Button=No, Rad Hardened=No, Relay Construction=Non-Latching, Seal=Unsealed, Supplier 1=Digi-Key, Supplier 2=Newark, Supplier Part Number 2=57AC7430, Termination Style=PCPin, Type=SafetyRelay
L1: "FIXED IND 4.7UH 1.43A 87 MOHM", Current - Saturation=1.43A, DC Resistance (DCR)="87 mOhm Max", Device Package=Nonstandard, Inductance=4.7uH, Manufacturer="TDK Corporation", Operating Temperature="-40C ~ 105C", Supplier Part Number 1=445-8737-2-ND, Tolerance=30%, ComponentLink1Description=Datasheet, ComponentLink1URL=https://product.tdk.com/info/en/catalog/datasheets/inductor_commercial_power_vlcf4024-2_en.pdf, ComponentLink2Description="Digi-Key Listing", ComponentLink2URL=https://www.digikey.com/product-detail/en/tdk-corporation/VLCF4024T-4R7N1R4-2/445-8737-2-ND/3083279, Current Rating=1.43A, Material - Core=Ferrite, PartId=16432, Part Number=VLCF4024T-4R7N1R4-2, Price=0.441, Series=VLCF, Shielding=Shielded, Supplier 1=Digi-Key, Type=Wirewound
L2: "FIXED IND 10UH 900MA 136 MOHM", Current - Saturation=900mA, DC Resistance (DCR)="136 mOhm Max", Device Package=Nonstandard, Inductance=10uH, Manufacturer="TDK Corporation", Operating Temperature="-40C ~ 105C", Supplier Part Number 1=445-8727-2-ND, Tolerance=20%, ComponentLink1Description=Datasheet, ComponentLink1URL=https://product.tdk.com/info/en/catalog/datasheets/inductor_commercial_power_vlcf4024-2_en.pdf, ComponentLink2Description="Digi-Key Listing", ComponentLink2URL=https://www.digikey.com/product-detail/en/tdk-corporation/VLCF4024T-100MR90-2/445-8727-2-ND/3083281, Current Rating=900mA, Material - Core=Ferrite, PartId=16429, Part Number=VLCF4024T-100MR90-2, Price=0.441, Series=VLCF, Shielding=Shielded, Supplier 1=Digi-Key, Type=Wirewound
R1: library part ERJ-8ENF1001V, "RES SMD 1K OHM 1% 1/4W 1206", Device Package="1206 (3216 Metric)", Manufacturer="Panasonic Electronic Components", PowerRating="0.25W, 1/4W", Supplier Part Number 1=P1.00KFTR-ND, TemperatureCoefficient=100ppm/C, TemperatureRange="-55C ~ 155C", Tolerance=1%, ComponentLink1Description=Datasheet, ComponentLink1URL=http://industrial.panasonic.com/www-cgi/jvcr13pz.cgi?E+PZ+3+AOA0002+ERJ8ENF1001V+7+WW, ComponentLink2Description="Digi-Key listing", ComponentLink2URL=http://digikey.com/product-detail/en/ERJ-8ENF1001V/P1.00KFTR-ND/86206, PartId=2958, Part Number=ERJ-8ENF1001V, Price=0.0093, Supplier 1=Digi-Key, Type="Thick Film"
R2: library part 91AR20KLF, "TRIMMER 20K OHM 3/8\" CERMET TH", Manufacturer="TT Electronics/BI", PowerRating="0.5W, 1/2W", Supplier Part Number 1=987-1170-ND, Tolerance=20%, Adjustment Type="Top Adjustment", ComponentLink1Description=Datasheet, ComponentLink1URL=http://www.bitechnologies.com/pdfs/91.pdf, ComponentLink2Description="Digi-Key Listing", ComponentLink2URL=http://www.digikey.ca/product-detail/en/91AR20KLF/987-1170-ND/2408748, Number Of Turns=Single, PartId=7167, Part Number=91AR20KLF, Price=2.25, Supplier 1=Digi-Key, Type="Through Hole"
R3: library part ERJ-8GEYJ514V, "RES SMD 510K OHM 5% 1/4W 1206", Device Package="1206 (3216 Metric)", Manufacturer="Panasonic Electronic Components", PowerRating="0.25W, 1/4W", Supplier Part Number 1=P510KETR-ND, TemperatureCoefficient=200ppm/C, TemperatureRange="-55C ~ 155C", Tolerance=5%, ComponentLink1Description=Datasheet, ComponentLink1URL=http://industrial.panasonic.com/www-cgi/jvcr13pz.cgi?E+PZ+3+AOA0001+ERJ8GEYJ514V+7+WW, ComponentLink2Description="Digi-Key Listing", ComponentLink2URL=https://www.digikey.com/product-detail/en/panasonic-electronic-components/ERJ-8GEYJ514V/P510KETR-ND/21336, PartId=11855, Part Number=ERJ-8GEYJ514V, Price=0.0045, Supplier 1=Digi-Key
R4 R5 R6 R8 R15: library part ERJ-8ENF1002V, "RES SMD 10K OHM 1% 1/4W 1206", Device Package="1206 (3216 Metric)", Manufacturer="Panasonic Electronic Components", PowerRating="0.25W, 1/4W", Supplier Part Number 1=P10.0KFTR-ND, TemperatureCoefficient=100ppm/C, TemperatureRange="-55C ~ 155C", Tolerance=1%, ComponentLink1Description=Datasheet, ComponentLink1URL=http://industrial.panasonic.com/www-cgi/jvcr13pz.cgi?E+PZ+3+AOA0002+ERJ8ENF1002V+7+WW, ComponentLink2Description="Digi-Key listing", ComponentLink2URL=http://digikey.com/product-detail/en/ERJ-8ENF1002V/P10.0KFTR-ND/89059, PartId=2956, Part Number=ERJ-8ENF1002V, Price=0.0093, Supplier 1=Digi-Key, Type="Thick Film"
R7 R9 R10 R14: library part ERJ-8ENF6200V, "RES SMD 620 OHM 1% 1/4W 1206", Device Package="1206 (3216 Metric)", Manufacturer="Panasonic Electronic Components", PowerRating="0.25W, 1/4W", Supplier Part Number 1=P620FTR-ND, TemperatureCoefficient=100ppm/C, TemperatureRange="-55C ~ 155C", Tolerance=1%, ComponentLink1Description=Datasheet, ComponentLink1URL=http://industrial.panasonic.com/www-cgi/jvcr13pz.cgi?E+PZ+3+AOA0002+ERJ8ENF6200V+7+WW, ComponentLink2Description="Digi-Key listing", ComponentLink2URL=http://digikey.com/product-detail/en/ERJ-8ENF6200V/P620FTR-ND/1746078, PartId=3356, Part Number=ERJ-8ENF6200V, Price=0.0093, Supplier 1=Digi-Key, Type="Thick Film"
R11: library part ERJ-P06D5492V, "RES SMD 54.9K OHM 0.5% 1/2W 0805", Device Package="0805 (2012 Metric)", Manufacturer="Panasonic Electronic Components", PowerRating="0.5W, 1/2W", Supplier Part Number 1=P16052TR-ND, TemperatureCoefficient=100ppm/C, TemperatureRange="-55C ~ 155C", Tolerance=0.5%, ComponentLink1Description=Datasheet, ComponentLink1URL=//media.digikey.com/pdf/Data%20Sheets/Panasonic%20Electronic%20Components/ERJ_PA2_P03_PA3_P06_P08_P14.pdf, ComponentLink2Description="Digi-Key Listing", ComponentLink2URL=https://www.digikey.com/product-detail/en/panasonic-electronic-components/ERJ-P06D5492V/P16052TR-ND/3982693, PartId=12299, Part Number=ERJ-P06D5492V, Price=0.0342, Supplier 1=Digi-Key
R12 R13: library part ERJ-P06F1002V, "RES SMD 10K OHM 1% 1/2W 0805", Device Package="0805 (2012 Metric)", Manufacturer="Panasonic Electronic Components", PowerRating="0.5W, 1/2W", Supplier Part Number 1=P16059TR-ND, TemperatureCoefficient=100ppm/C, TemperatureRange="-55C ~ 155C", Tolerance=1%, ComponentLink1Description=Datasheet, ComponentLink1URL=//media.digikey.com/pdf/Data%20Sheets/Panasonic%20Electronic%20Components/ERJ_PA2_P03_PA3_P06_P08_P14.pdf, ComponentLink2Description="Digi-Key Listing", ComponentLink2URL=https://www.digikey.com/product-detail/en/panasonic-electronic-components/ERJ-P06F1002V/P16059TR-ND/3982700, PartId=12237, Part Number=ERJ-P06F1002V, Price=0.0192, Supplier 1=Digi-Key
RLOK1 RLOK2: "Typical RED GaAs LED", LatestRevisionDate=08-Jul-2005, LatestRevisionNote="Mech Layer 1 removed.", PackageDescription="LED; 2 Leads", PackageReference=LED-1, Published=8-Jun-2000, Publisher="Altium Limited"
RLY_F: "CONN HEADER 2POS .100 VERT TIN", Colour=Natural, Manufacturer="Molex, LLC", Supplier Part Number 1=WM4111-ND, ComponentLink1Description=Datasheet, ComponentLink1URL=http://www.molex.com/pdm_docs/sd/022272021_sd.pdf, ComponentLink2Description="Digi-Key Listing", ComponentLink2URL=http://www.digikey.com/product-search/en?keywords=22-27-2021, Contact Finish=Tin, Fastening Type="Friction Lock", Number Of Positions=2, Number Of Rows=1, PartId=9719, Part Number=0022272021, Pitch="0.100\" (2.54mm)", Price=0.25, Series="KK 6410", Supplier 1=Digi-Key, Type="Header, Unshrouded"
RST: "SWITCH PUSH SPST-NO 0.4VA 28V", Illumination Type, Colour=-, Manufacturer="NKK Switches", Operating Temperature="-30C ~ 85C", Supplier Part Number 1=360-2604-ND, Actuator Type="Round, Button", Circuit=SPST-NO, ComponentLink1Description=Datasheet, ComponentLink1URL=http://2t70un3m1d9z1kztamkdrd38.wpengine.netdna-cdn.com/wp-content/uploads/2016/02/Apushbuttons-2.pdf, ComponentLink2Description="Digi-Key Listing", ComponentLink2URL=http://www.digikey.com/product-detail/en/nkk-switches/AB11AH-HC/360-2604-ND/1056046, Illumination Voltage=-, Mechanical Life="50,000 Cycles", PartId=16763, Part Number=AB11AH-HC, Price=5, Series=AB, Supplier 1=Digi-Key, Switch Function=Off-Mom, Type=Standard
U1: library part CMP-1305-00058-1, "Single Comparator, 5 to 30 V, 0 to 70 degC, 8-Pin SOIC, Pb-Free, Tape and Reel", Manufacturer="On Semiconductor", ComponentLink1Description="Manufacturer URL", ComponentLink1URL=http://www.onsemi.com/, ComponentLink2Description=Datasheet, ComponentLink2URL=http://www.onsemi.com/pub_link/Collateral/LM211-D.PDF, ComponentLink3Description="Package Specification", ComponentLink3URL=http://www.onsemi.com/pub_link/Collateral/751-07.PDF, DatasheetVersion="Rev. 6", ICC Typ (mA)=2.4, Mounting Technology="Surface Mount", PackageDescription="8-Pin Small Outline Integrated Circuit, Body 4.9 x 3.9 mm, Pitch 1.27 mm", PackageReference=SOIC-8-751-07, PackageVersion="Rev. AK, 02/2011", Packing="Tape and Reel", PartNumber=LM311DR2G, RoHS=TRUE, VCC Max (V)=30, VCC Min (V)=5
U2: library part CMP-2000-06840-1, "Precision Timer, 4.5 to 16 V, 0 to 70 degC, 8-Pin SOIC (D), Green (RoHS & no Sb/Br), Tube", Digital IC Case Style=SOIC, Frequency=500kHz, IC Temperature Range=Commercial, Manufacturer="Texas Instruments", Operating Frequency Max=0.5MHz, Operating Mode=Astable,Monostable, Operating Temperature Max=70°C, Operating Temperature Min=0°C, Operating Temperature Range=0°Cto+70°C, Package Description="8-Pin Small Outline Integrated Circuit, Body 4.9 x 3.9 mm, Pitch 1.27 mm", Package Reference=D8, PartNumber=NE555, Supply Voltage Max=16V, Supply Voltage Min=4.5V, Supply Voltage Range=4.5Vto16V, Base Number=555, Clock External Input=No, Datasheet URL=http://www.ti.com/general/docs/lit/getliterature.tsp?genericPartNumber=NE555&fileType=pdf, Datasheet Version="Rev. I, 09/2014", Device Marking=NE555D, IC Generic Number=555, Logic Function Number=555, Manufacturer URL=http://www.ti.com/, Mounting Technology=SurfaceMount, No. of Channels=1, No. of Pins=8, No. of Timers=1, Package / Case=SOIC, Package URL=http://www.ti.com/lit/ml/msoi002j/msoi002j.pdf, SVHC=NoSVHC(19-Dec-2012)
U3: library part CMP-0777-00096-3, "High Speed CMOS Logic Dual 4-Input AND Gates, D0014A, LARGE T&R", F @ Nom Voltage(Max)(Mhz)=70, Generic Part Number=CD74HC21, ICC @ Nom Voltage(Max)(mA)=0.02, Manufacturer="Texas Instruments", Operating Temperature Range(C)="-55 to 125", Rating=Catalog, tpd @ Nom Voltage(Max)(ns)=28, Voltage(Nom)(V)=5, Bits(#)=2, DatasheetVersion=SCHS131C, Input Type=CMOS, Output Drive (IOL/IOH)(Max)(mA)=-5.2/5.2, Output Type=CMOS, PackageReference=D0014A, Schmitt Trigger=No, Technology Family=HC, VCC(Max)(V)=6, VCC(Min)(V)=2
U4: library part CMP-0859-00174-3, "Single 2-Input Exclusive-OR Gate, DBV0005A, LARGE T&R", F @ Nom Voltage(Max)(Mhz)=150, Generic Part Number=SN74LVC1G86, ICC @ Nom Voltage(Max)(mA)=0.01, Manufacturer="Texas Instruments", Operating Temperature Range(C)="-40 to 125,-40 to 85", Rating=Catalog, tpd @ Nom Voltage(Max)(ns)=9.9,5.5,5,4, Voltage(Nom)(V)=1.8,2.5,3.3,5, 3-State Output=No, Bits(#)=1, DatasheetVersion=SCES222O, Gate Type=XOR, Input Type=CMOS/TTL, Logic=True, Output Drive (IOL/IOH)(Max)(mA)=32/-32, Output Type=CMOS, PackageReference=DBV0005A, Schmitt Trigger=No, Sub-Family="XOR Gate", Technology Family=LVC, VCC(Max)(V)=5.5, VCC(Min)(V)=1.65
XF1: library part CMP-1502-00234-1, "WR-FSH Fuse Holder Blocks Fuse Holder Blocks Clip Cover for PCB", Manufacturer="Wurth Elektronik", Operating Temperature=-30to120degC, Datasheet URL=https://katalog.we-online.de/em/datasheet/696105003002.pdf, Fuse Size=5x20mm, Manufacturer URL=http://www.we-online.de, Mounting Technology=THT, Package Reference=696105003002, Packaging=Box, Part Number=696105003002, Publisher=WurthElektronik

## Free pads (board coordinates)
  rect 2.2x2.7 smd far side: 1(38.862,38.618) 2(38.862,33.518)
  rect 0.35x0.4 smd: 1(53.467,45.283) 2(53.467,45.903)
  round 4 hole 3.5: 3(161.798,68.58)

## Via types
v1: diameter 1.27, hole 0.711, Top Layer to Bottom Layer, 30 vias

## Nets (pads, with @x,y where several pads share a name; then routed paths per layer and width w, separated by ;. In a path a pad name is that pad's centre, name@x,y a point inside that pad or via, vN(x,y) a via of type N, cw(c..) or ccw(c..) an arc to the next point about the centre after c; other vN are vias at no path point)
+5: C4.2 C6.1 C7.1 C8.1 C10.2 C11.1 C14.1 C16.1 C21.2 C22.2 EXT_SWITCH.1 IC2.1 IC2.7 INT/SW.1 L1.1 pad.2@38.862,33.518 POW5.1 R1.2 R4.2 R7.1 R11.2 U2.8 U3.5 U3.14 | length 17.6
  Bottom Layer w0.508: EXT_SWITCH.1 33.399,44.196 34.618,42.977 34.618,42.231 R11.2 ; pad.2@38.862,33.518 39.106,33.274 C6.1 ; C21.2 43.254,38.866 41.945,37.557 41.945,34.382 C6.1 ; C22.2 46.032,33.406 43.185,33.406 C6.1
+5_OUT: C9.1 C13.1 C15.1 D1.2 IC2.16 K1.12 K1.21 K1.A1 L2.2 ON.1 U4.5 | length 29.4
  Top Layer w0.508: IC2.16 88.731,47.498 88.774,47.54 88.774,48.858 C15.1
  Bottom Layer w0.508: K1.A1 109.713,45.476 109.728,45.491 123.696,45.491 K1.21 123.711,48.076 K1.12
+12: BYP.3 C2.1 C18.2 C19.2 C20.2 IC4.3 POW12.1 R2.3 SW5V.3 | length 82.4
  Top Layer w0.508: SW5V.3 39.794,65.159 40.357,65.722 50.991,65.722 R2.3 62.446,57.531 C2.1 62.639,57.597 62.639,58.866 69.093,65.32 BYP.3
  Bottom Layer w0.508: IC4.3 41.807,41.26 42.375,41.26 42.769,41.654 42.769,41.981 43.638,42.85 C20.2 45.98,42.85 C19.2@46.81,42.02 ; C19.2 C19.2@46.81,42.02 ; R2.3 59.182,48.006 57.732,46.556 C18.2 49.28,46.556 46.81,44.086 C19.2@46.81,42.02
  Bottom Layer w1.016: POW12.1@33.239,37.246 36.284,37.246 37.462,36.068 40.019,36.068 40.89,36.939 40.89,39.958 41.761,40.829 IC4.3@41.761,40.975
  Bottom Layer w1.27: POW12.1 POW12.1@33.239,37.246
AC_GND: AC_POW_IN.3 AC_POW_OUT.3 pad.3
AC_LIVE: K1.34 K1.44 | length 7.6
  Top Layer w2.54: K1.44 K1.34
AC_LIVE_Fuse: AC_POW_OUT.2 XF1.2 | length 12.5
  Top Layer w1.6: 143.515,61.849 144.785,60.579 AC_POW_OUT.2
  Top Layer w2.54: XF1.2 143.515,61.849
AC_LIVE_IN: AC_POW_IN.2 K1.43 | length 11.1
  Top Layer w2.54: K1.43 141.618,44.069 AC_POW_IN.2
AC_LIVE_OUT: K1.33 XF1.1 | length 21.2
  Top Layer w2.54: XF1.1 126,61.849 130.386,57.462 137.356,57.462 140.211,54.607 K1.33
AC_NEUTRAL: AC_POW_IN.1 AC_POW_OUT.1 | length 29.9
  Top Layer w1.5: AC_POW_OUT.1 150.609,64.045 156.935,64.045 158.788,62.192
  Top Layer w2.54: AC_POW_IN.1@151.982,47.625 152.175,47.625 152.617,47.183 156.951,47.183 158.788,49.02 158.788,62.192
GND: A1.1 BYP.1 C1.2 C2.2 C3.1 C4.1 C5.2 C6.2 C7.2 C8.2 C10.1 C11.2 C12.2 C14.2 C16.2 C18.1 C19.1 C20.1 C21.1 C22.1 FAIL.2 IC2.2 IC2.4 IC2.5 IC2.8 IC3.3 IC4.1 pad.1@53.467,45.283 POW5.2 POW12.2 R2.1 R5.1 R12.1 R13.1 RLY_F.1 RST.3 SW5V.1 U1.1 U1.4 U2.1 U2.6 U3.7 U3.9 U3.10 U3.12 U3.13 | length 114.1
  Top Layer w0.508: R13.1 29.21,68.226 29.877,67.559 29.877,67.441 32.258,65.059 SW5V.1 34.794,65.028 35.14,64.682 36.156,64.682 v1(38.354,62.484) 38.843,62.484 U1.1 ; v1(33.274,52.832) C5.2 ; v1(37.338,57.658) 37.465,57.531 U1.4 ; C1.2 47.998,62.965 49.141,62.965 53.97,58.137 53.97,57.663 R2.1 ; C14.2 48.742,48.133 46.961,46.352 R5.1 48.892,44.196 v1(49.276,44.196) 49.295,44.177 51.543,44.177 C12.2 51.958,44.554 52.826,44.554 ; v1(54.102,43.688) 53.896,43.688 53.03,44.554 52.826,44.554 ; U3.7 55.014,45.004 53.658,45.004 53.467,45.195 52.826,44.554 ; U3.9 U3.10 61.722,47.498 62.23,48.006 62.23,48.298 ; U3.13 U3.12 60.935,50.038 61.365,49.608 61.384,49.608 62.23,48.762 62.23,48.298 ; C11.2 63.261,55.209 64.147,55.209 64.564,55.626 64.77,55.626 ; C2.2 64.442,57.008 64.442,55.954 64.77,55.626 ; BYP.1 65.729,67.056 v1(65.786,67.056) ; v1(68.072,54.61) 67.056,55.626 64.77,55.626 ; v1(75.438,39.116) 75.438,38.788 IC3.3 76.538,37.78 77.658,37.78 78.486,38.608 IC2.8 ; A1.1 A1.1@77.406,55.942 ; C16.2 v1(77.47,52.578) ; IC2.5@79.229,42.436 IC2.5 78.572,42.418 77.956,43.034 77.616,43.034 v1(77.47,43.18) 77.616,43.326 78.21,43.326 78.572,43.688 IC2.4 ; IC2.2 75.222,46.228 C3.1 74.88,46.52 74.41,46.99 U2.6 72.242,47.477 71.923,47.477 71.14,48.26 v1(70.866,48.26) 69.596,49.53 U2.1 63.462,49.53 62.23,48.298
  Top Layer w1.27: POW12.2 33.652,39.878 34.922,38.608 36.445,38.608 37.552,39.715 37.552,40.6 R12.1 ; C7.2 v1(50.038,38.608) ; C8.2 v1(54.102,38.608) ; v1(68.072,54.61) 68.125,54.557 C10.1 70.881,54.572 72.86,54.572 72.898,54.61 73.406,54.61 73.406,52.743 74.738,51.411 74.738,51.361 74.753,51.346 C4.1 ; A1.1 77.343,52.705 v1(77.47,52.578)
GND_Out: A1.7 C9.2 C13.2 C15.2 D1.1 IC1.3 IC2.9 IC2.12 IC2.13 IC2.15 ON.3 R6.1 R8.2 R15.2 RLOK1.2 RLOK2.2 U4.3 | length 91.9
  Top Layer w0.508: A1.7 90.655,56.007 D1.1 90.655,59.052 92.918,61.316 96.266,61.316 96.266,62.177 C9.2 103.149,62.177 105.28,60.046 R8.2 ; C15.2 v1(88.9,52.324) ; IC1.3 93.66,49.291 94.578,48.374 v1(94.578,47.13) 93.675,46.228 IC2.15 86.97,46.228 86.462,45.72 86.462,44.704 87.478,43.688 IC2.13 IC2.12 ; ON.3 97.501,43.688 96.332,44.856 95.492,44.856 93.054,42.418 IC2.12 ; C13.2 102.564,46.938 v1(102.616,46.99) ; RLOK2.2 92.456,29.21 91.313,30.353 R6.1 90.3,35.049 89.789,35.56 89.789,38.608 IC2.9 87.681,38.608 87.173,39.116 87.173,42.164 87.427,42.418 IC2.12 ; U4.3 100.864,51.263 103.079,51.263 v1(103.124,51.308)
  Top Layer w1.27: D1.1 90.782,57.404 v1(92.71,57.404)
NetA1_3: A1.3 L1.2 | length 13.1
  Top Layer w0.508: L1.2 71.935,60.198 79.604,60.198 79.883,59.919 A1.3
NetA1_8: A1.8 L2.1 | length 6.4
  Top Layer w0.508: A1.8 84.963,64.948 89.99,64.948 L2.1
NetBYP_2: BYP.2 C1.1 U1.8 | length 30.2
  Top Layer w0.508: U1.8 45.512,61.387 47.382,61.387 C1.1 47.729,61.684 49.069,60.344 50.146,60.344 v1(50.292,60.198) ; v1(52.578,69.85) 52.608,69.82 BYP.2
  Bottom Layer w0.508: v1(50.292,60.198) 52.578,62.484 v1(52.578,69.85)
NetC3_2: C3.2 U2.5 | length 2.5
  Top Layer w0.508: U2.5 73.079,45.72 73.865,44.934 74.916,44.934 C3.2
NetC5_1: C5.1 J1.1 U3.2 | length 27.5
  Top Layer w0.508: J1.1 33.274,59.69 C5.1 45.466,56.134 50.292,51.308 U3.2
NetC12_1: C12.1 pad.2@53.467,45.903 U2.2 U3.6 | length 18.7
  Top Layer w0.254: C12.1 51.707,45.903 53.467,45.903 53.467,45.928 53.767,46.228 U3.6
  Top Layer w0.508: U3.6 56.642,46.228 58.725,44.145 62.713,44.145 66.827,48.26 U2.2
NetC17_1: C17.1 IC4.6 | length 3.1
  Bottom Layer w0.508: C17.1 36.88,45.174 37.276,44.778 37.276,44.649 38.811,43.114 IC4.6
NetC17_2: C17.2 IC4.2 pad.1@38.862,38.618 | length 12.9
  Bottom Layer w0.508: C17.2 38.57,46.774 40.386,44.958 40.386,41.656 ; pad.1@38.862,38.618 39.708,39.464 39.708,40.393 40.386,41.071 40.386,41.656 ; IC4.2 41.715,42.118 40.848,42.118 40.386,41.656
NetEXT_SWITCH_2: EXT_SWITCH.2 INT/SW.3 | length 6
  Top Layer w1.27: EXT_SWITCH.2 33.196,46.785 39.116,46.785 INT/SW.3
NetFAIL_1: FAIL.1 R10.2 | length 3.8
  Top Layer w0.508: R10.2 80.642,31.112 FAIL.1
NetIC1_2: IC1.2 K1.A2 | length 16.5
  Top Layer w0.508: IC1.2 91.656,49.746 94.986,53.076 K1.A2
NetIC2_6: IC2.6 RLY_F.2 | length 17.4
  Top Layer w0.508: v1(76.944,41.166) 79.229,41.166 IC2.6
  Bottom Layer w0.508: RLY_F.2@72.644,29.21 72.644,38.989 74.93,41.275 76.835,41.275 v1(76.944,41.166)
NetIC2_10: IC2.10 ON.2 R6.2 | length 7.9
  Top Layer w0.508: IC2.10 92.532,39.878 92.532,39.707 ON.2 93.101,38.494 92.456,37.849 R6.2
NetIC3_2: IC3.2 R7.2 R10.1 | length 7.9
  Top Layer w0.508: R7.2 IC3.2 74.905,37.084 74.905,35.207 76.2,33.912 R10.1
NetIC4_4: IC4.4 R11.1 R12.2 | length 7.7
  Top Layer w0.508: v1(35.814,40.132) 35.96,40.278 35.96,40.976 36.707,41.723 36.825,41.723 37.492,42.39 R12.2
  Bottom Layer w0.508: v1(35.814,40.132) 35.814,40.338 36.368,40.892 36.368,41.489 36.689,41.81 37.01,41.489 37.52,41.489 37.749,41.26 38.965,41.26 IC4.4
NetIC4_5: IC4.5 R13.2 SW5V.2 | length 35.8
  Top Layer w0.508: R13.2 35.073,68.326 35.306,68.093 ; v1(35.306,67.056) 35.306,68.093 ; SW5V.2 35.662,69.459 35.306,69.103 35.306,68.326 35.306,68.093
  Bottom Layer w0.508: v1(35.306,67.056) 35.306,44.63 36.843,43.093 37.514,43.093 38.397,42.21 38.965,42.21 IC4.5
NetINT_SWITCH_2: INT/SW.2 R5.2 U3.4 | length 12.7
  Top Layer w0.508: R5.2 46.965,49.152 46.965,49.86 52.908,49.86 54,48.768 U3.4
  Top Layer w1.27: INT/SW.2 46.413,49.32 46.581,49.152 R5.2
NetJ1_2: J1.2 U1.3 | length 8.3
  Top Layer w0.508: J1.2 35.306,62.23 38.689,58.847 39.94,58.847 U1.3
NetR1_1: R1.1 R3.2 U1.7 U3.1 | length 18.1
  Top Layer w0.508: R3.2 44.38,62.16 44.198,61.978 44.198,60.831 44.552,60.476 44.601,60.476 45.006,60.071 U1.7 46.434,60.071 46.788,59.717 47.828,58.677 R1.1 48.816,58.677 52.095,55.397 52.095,53.848 53.365,52.578 U3.1
NetR2_2: R2.2 R3.1 U1.2 | length 23.7
  Top Layer w0.508: U1.2 41.199,60.071 41.58,60.452 R3.1 41.58,63.852 42.688,64.96 49.213,64.96 R2.2
NetR4_1: R4.1 RST.1 U2.4 | length 17.7
  Top Layer w0.508: RST.1 58.801,38.303 59.436,37.668 66.04,37.668 67.815,39.443 R4.1 67.815,45.72 U2.4
NetR9_2: R9.2 RLOK2.1 | length 3.7
  Top Layer w0.508: R9.2 RLOK2.1
NetR14_1: R14.1 RLOK1.1 | length 3
  Top Layer w0.508: R14.1 100.576,39.278 100.576,38.118 101.319,37.376 RLOK1.1
ON/OFF: IC2.3 IC3.1 U2.3 | length 27.1
  Top Layer w0.508: U2.3 69.266,46.99 72.568,43.688 76.108,43.688 77.378,44.958 IC2.3 80.467,44.958 80.721,44.704 80.721,37.592 79.563,36.434 IC3.1
ON/OFF_ISO: IC1.1 IC2.14 | length 7.3
  Top Layer w0.508: IC2.14 v1(92.151,44.958) ; v1(92.151,47.371) 92.771,47.991 IC1.1
  Bottom Layer w0.508: v1(92.151,44.958) v1(92.151,47.371)
RLY1: K1.22 R14.2 R15.1 U4.1 | length 75.8
  Top Layer w0.508: U4.1 115.316,49.342 ; R14.2 109.474,39.624 115.316,45.466 115.316,49.342 ; K1.22 124.845,49.342 115.316,49.342
  Bottom Layer w0.508: R15.1 121.92,35.052 124.46,37.592 124.46,42.418 127.518,45.476 K1.22
RLY2: K1.11 R8.1 R9.1 U4.2 | length 72.3
  Top Layer w0.508: R9.1 93.85,37.208 95.504,38.862 95.504,40.386 ; v1(96.012,40.894) 96.012,40.919 96.241,41.148 v1@96.012,41.148 ; U4.2 102.219,50.292 102.346,50.165 106.553,50.165 108.08,51.692 108.08,53.34 ; v1(104.902,40.894) 105.766,40.894 112.268,47.396 v1(112.268,47.498) ; R8.1 108.08,53.34 ; K1.11 108.344,53.076 108.08,53.34
  Bottom Layer w0.508: v1(96.012,40.894) v1(104.902,40.894) ; v1(112.268,47.498) 117.846,53.076 K1.11
RLYFAULT: IC2.11 U4.4 | length 16.5
  Top Layer w0.508: IC2.11 v1(91.44,41.148) ; v1(95.758,49.276) 95.758,50.038 96.962,51.242 U4.4
  Bottom Layer w0.508: v1(91.44,41.148) 95.758,45.466 v1(95.758,49.276)
pads on no net: A1.14 AC_POW_IN.M AC_POW_OUT.M BYP.MH1 BYP.MH2 INT/SW.MH1 INT/SW.MH2 ON.MH1 ON.MH2 RST.2 RST.4 SW5V.MH1 SW5V.MH2 U1.5 U1.6 U2.7 U3.3 U3.8 U3.11 XF1.MH1

## Polygon pours and split planes (outlines as drawn)
GND on Bottom Layer "GND_L02_P004" (solid, pour order 4): 27.305,68.58 28.575,68.58 29.845,69.85 78.105,69.85 80.645,67.31 80.645,34.925 83.185,32.385 83.185,26.67 82.55,26.035 29.845,26.035 26.67,29.21 26.67,67.945
GND_Out on Bottom Layer "GND_OUT_L02_P009" (solid, pour order 9): 85.09,69.85 83.82,68.58 83.82,51.562 87.376,48.006 87.376,34.544 95.25,26.67 103.886,26.67 107.442,30.226 107.442,67.818 105.41,69.85